# EAGLE board USB_Bit_Whacker-18F2553_Panel_v13a (EAGLE 7.5.0), part 1 of 2
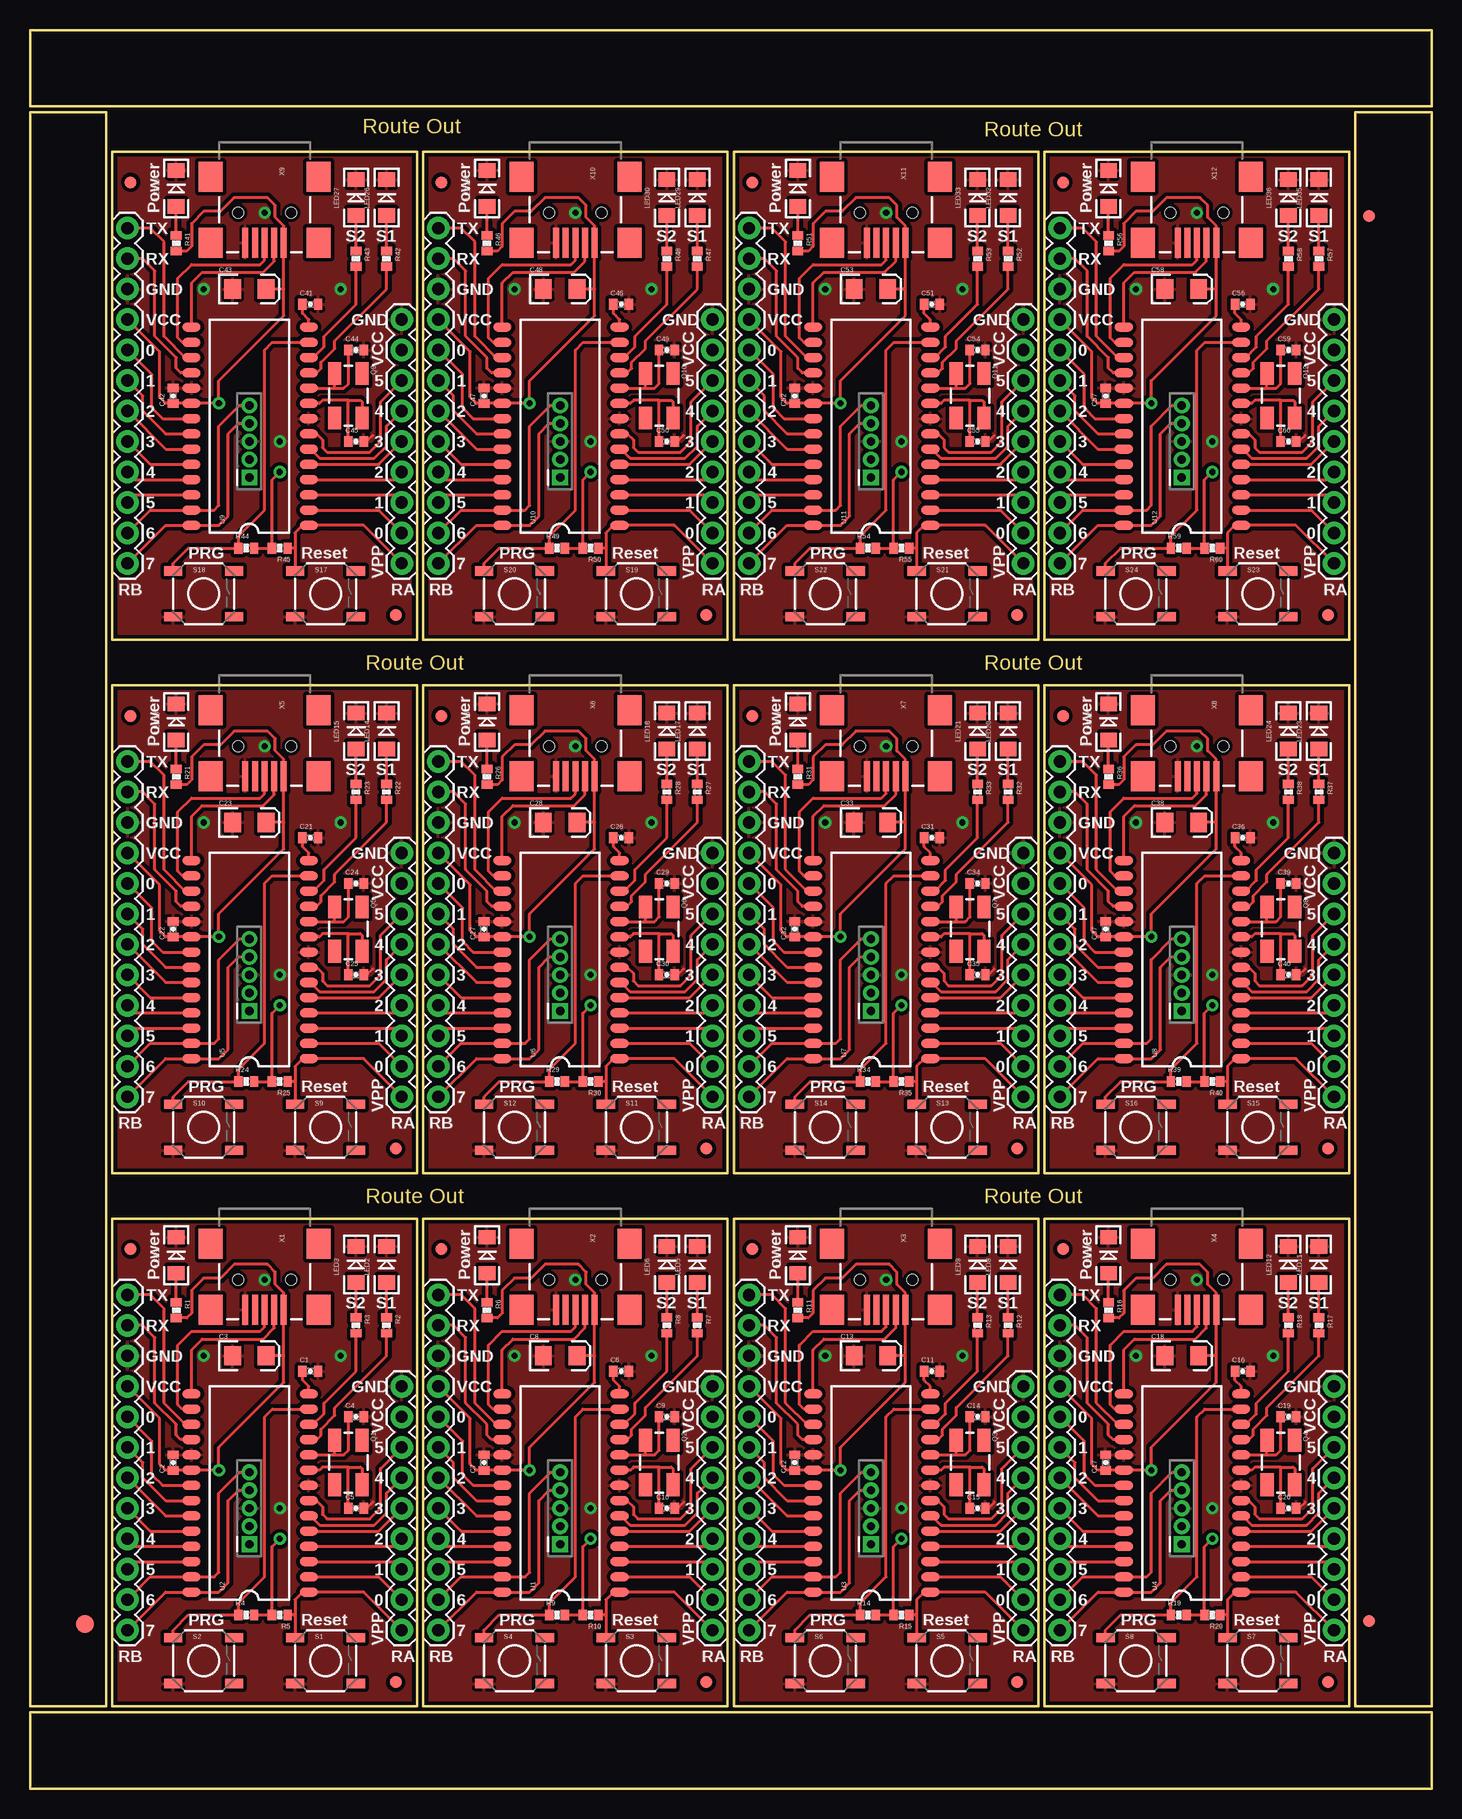
[diagram p0: board, top side]
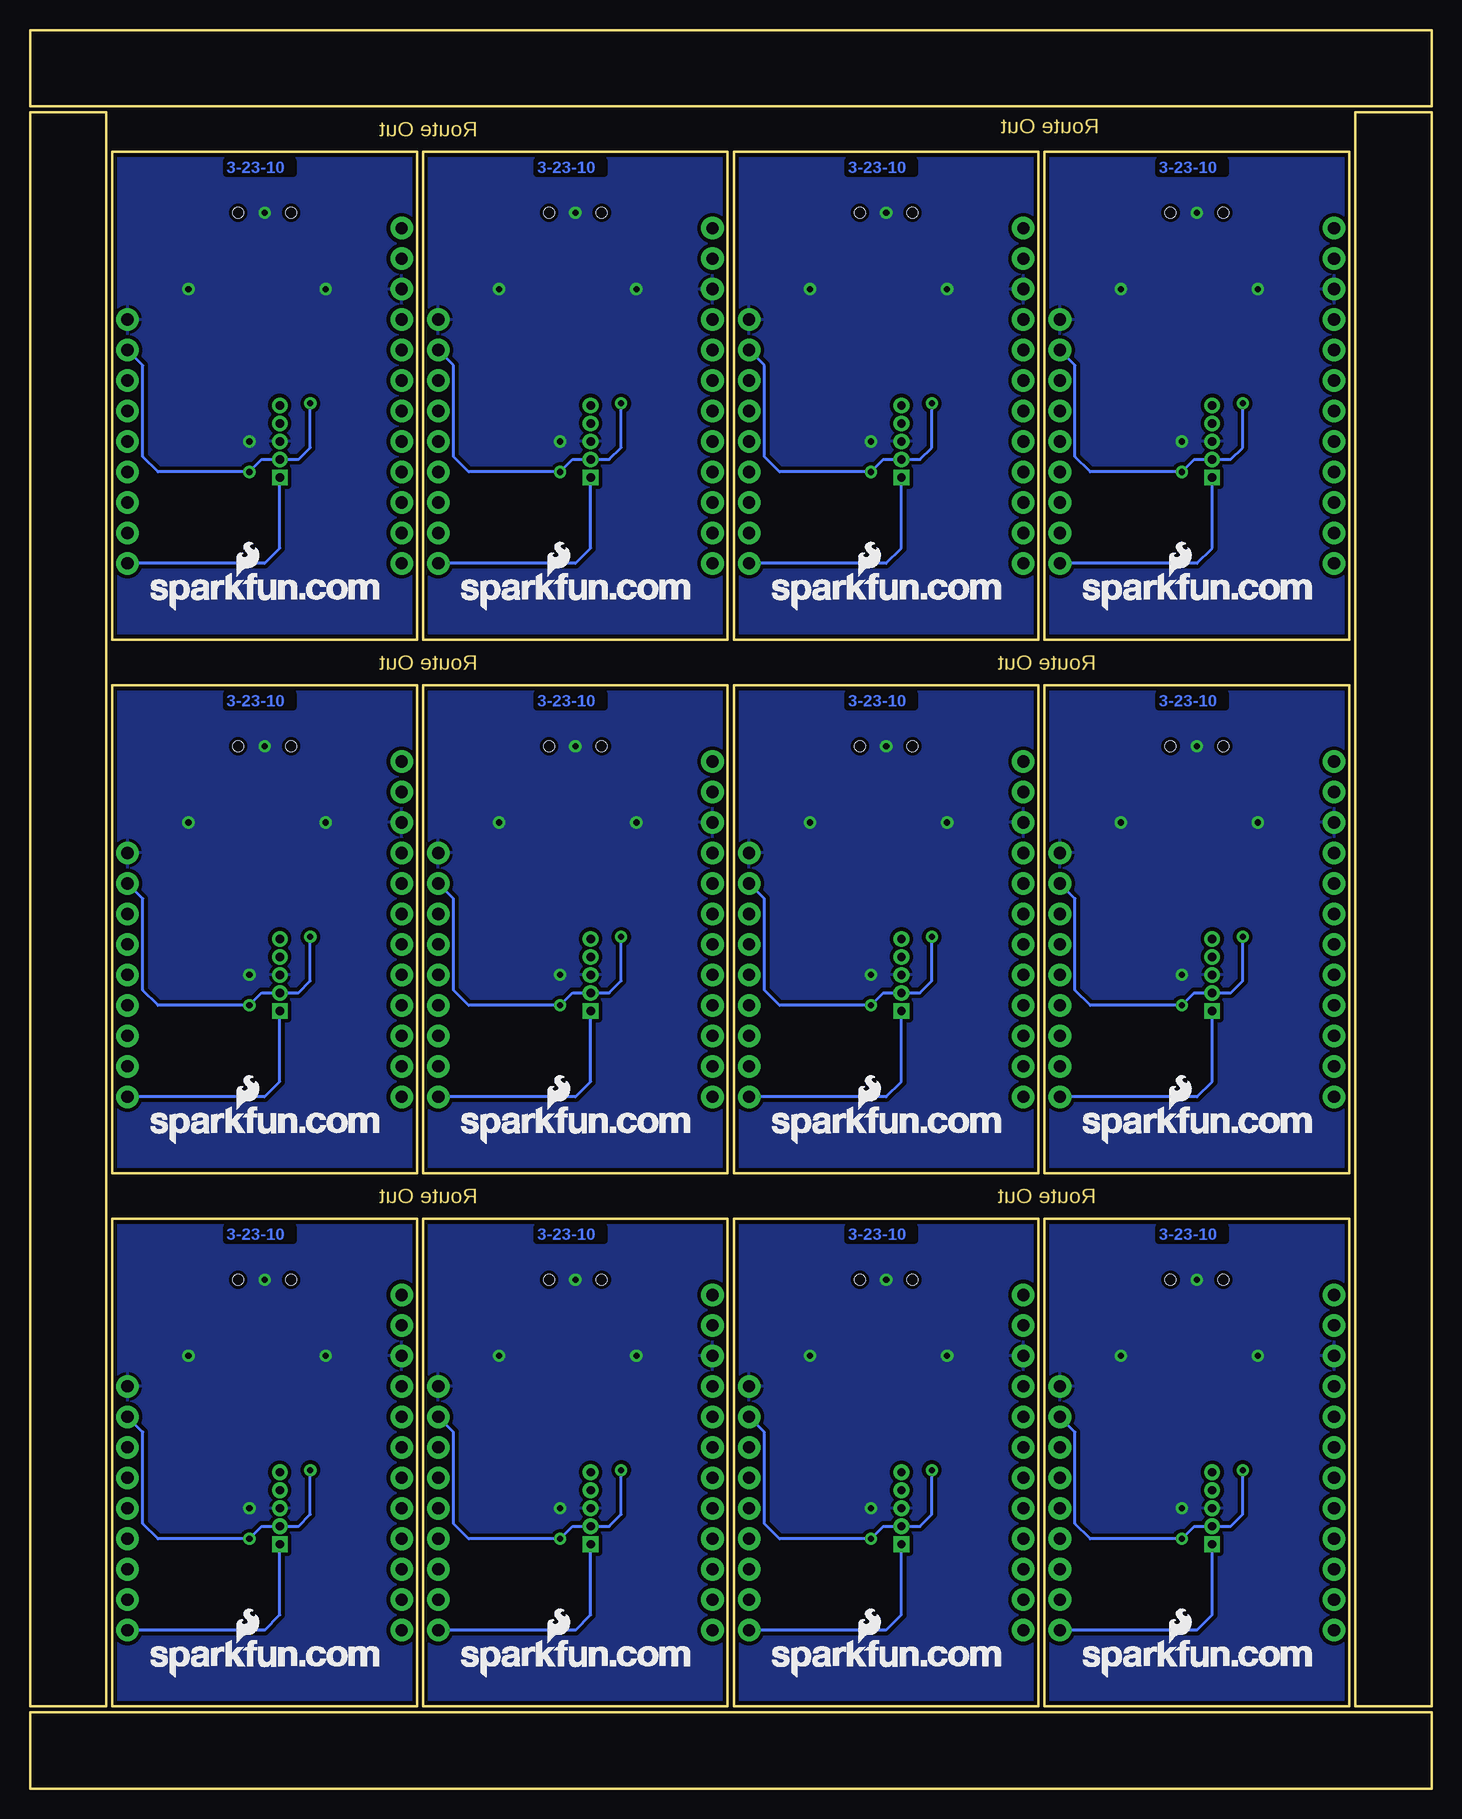
[diagram p1: board, bottom side, seen from below]

Size 116.84 x 146.56 mm. Coordinates in mm from the lower left corner, seen from the top.
Outline: 79.25,140.21 0,140.21 0,146.56 29.72,146.56
Outline: 27.18,146.56 116.84,146.56 116.84,140.21 76.71,140.21
Outline: 6.35,79.25 6.35,6.86 0,6.86 0,29.72
Outline: 0,27.18 0,139.7 6.35,139.7 6.35,76.71
Outline: 79.25,0 0,0 0,6.35 29.72,6.35
Outline: 27.18,6.35 116.84,6.35 116.84,0 76.71,0
Outline: 116.84,79.25 116.84,6.86 110.49,6.86 110.49,29.72
Outline: 110.49,27.18 110.49,139.7 116.84,139.7 116.84,76.71
Outline: 6.86,6.86 32.26,6.86 32.26,47.5 6.86,47.5 6.86,6.86
Outline: 32.77,6.86 58.17,6.86 58.17,47.5 32.77,47.5 32.77,6.86
Outline: 58.67,6.86 84.07,6.86 84.07,47.5 58.67,47.5 58.67,6.86
Outline: 84.58,6.86 109.98,6.86 109.98,47.5 84.58,47.5 84.58,6.86
Outline: 6.86,51.31 32.26,51.31 32.26,91.95 6.86,91.95 6.86,51.31
Outline: 32.77,51.31 58.17,51.31 58.17,91.95 32.77,91.95 32.77,51.31
Outline: 58.67,51.31 84.07,51.31 84.07,91.95 58.67,91.95 58.67,51.31
Outline: 84.58,51.31 109.98,51.31 109.98,91.95 84.58,91.95 84.58,51.31
Outline: 6.86,95.76 32.26,95.76 32.26,136.4 6.86,136.4 6.86,95.76
Outline: 32.77,95.76 58.17,95.76 58.17,136.4 32.77,136.4 32.77,95.76
Outline: 58.67,95.76 84.07,95.76 84.07,136.4 58.67,136.4 58.67,95.76
Outline: 84.58,95.76 109.98,95.76 109.98,136.4 84.58,136.4 84.58,95.76
Copper layers (1*16): Top 0.035mm / dielectric 1.5mm / Bottom 0.035mm
Design rules "SparkFun": minimum track width 8mil, minimum drill 20mil, track to track 8mil, track to pad 8mil, pad to pad 8mil, via to via 8mil, smd to smd 8mil, copper to edge 10mil, drill to drill 8mil, minimum pad ring 12mil, minimum via ring 10mil, stop-mask expansion 4mil, vias tented up to drill 20mil, thermal gap 10mil

## Footprints (pad centres in the part's own frame; a part is rotated, then mirrored left to right if it is on the bottom)
0402-CAP = smd 0.7 x 0.9: 1 -0.65,0; 2 0.65,0
EIA3216 = smd 1.4 x 1.6: A 1.4,0; C -1.4,0
FIDUCIAL-1.5X3 = smd 1.5 x 1.5: 1 0,0
FIDUCIAL-1X2 = smd 1 x 1: 1 0,0
1X12 = drill 1.016 pad 1.88: 1 0,0; 2 2.54,0; 3 5.08,0; 4 7.62,0; 5 10.16,0; 6 12.7,0; 7 15.24,0; 8 17.78,0; 9 20.32,0; 10 22.86,0; 11 25.4,0; 12 27.94,0
PIC-ICSP-MINI = drill 0.7 square: 1 -3,0 | drill 0.7: 2 -1.5,0; 3 0,0; 4 1.5,0; 5 3,0
1X09 = drill 1.016 pad 1.88: 1 0,0; 2 2.54,0; 3 5.08,0; 4 7.62,0; 5 10.16,0; 6 12.7,0; 7 15.24,0; 8 17.78,0; 9 20.32,0
LED-1206 = smd 1.2 x 1.4: A -1.5,0; C 1.5,0
CRYSTAL-SMD-5X3 = smd 1.9 x 1.1: 1 -1.85,-1.15; 2 1.85,-1.15; 3 1.85,1.15; 4 -1.85,1.15
0402-RES = smd 0.7 x 0.9: 1 -0.65,0; 2 0.65,0
TACTILE_SWITCH_SMD = smd 1.524 x 0.762: 1 -2.54,1.905; 2 2.54,1.905; 3 -2.54,-1.905; 4 2.54,-1.905
SO-28W = smd 0.762 x 1.524: 1 -8.255,-4.953; 2 -6.985,-4.953; 3 -5.715,-4.953; 4 -4.445,-4.953; 5 -3.175,-4.953; 6 -1.905,-4.953; 7 -0.635,-4.953; 8 0.635,-4.953; 9 1.905,-4.953; 10 3.175,-4.953; 11 4.445,-4.953; 12 5.715,-4.953; 13 6.985,-4.953; 14 8.255,-4.953; 15 8.255,4.826; 16 6.985,4.826; 17 5.715,4.826; 18 4.445,4.826; 19 3.175,4.826; 20 1.905,4.826; 21 0.635,4.826; 22 -0.635,4.826; 23 -1.905,4.826; 24 -3.175,4.826; 25 -4.445,4.826; 26 -5.715,4.826; 27 -6.985,4.826; 28 -8.255,4.826
USB-MINIB = smd 2.5 x 0.5: D+ 2.5,0; D- 2.5,0.8; GND 2.5,-1.6; ID 2.5,-0.8; VBUS 2.5,1.6 | smd 2.5 x 2: GND@1 -3,-4.5; GND@2 -3,4.5; GND@3 2.5,4.5; GND@4 2.5,-4.5 | hole 0.9: 0,2.2; 0,-2.2

## Placement (x,y rotation side)
C1  0.1uF  [0402-CAP]  23.37,34.8 0 top
C2  0.1uF  [0402-CAP]  11.94,27.18 90 top
C3  10uF  [EIA3216]  18.29,36.07 0 top
C4  22pF  [0402-CAP]  27.18,30.99 0 top
C5  22pF  [0402-CAP]  27.18,23.37 0 top
C6  0.1uF  [0402-CAP]  49.28,34.8 0 top
C7  0.1uF  [0402-CAP]  37.85,27.18 90 top
C8  10uF  [EIA3216]  44.2,36.07 0 top
C9  22pF  [0402-CAP]  53.09,30.99 0 top
C10  22pF  [0402-CAP]  53.09,23.37 0 top
C11  0.1uF  [0402-CAP]  75.18,34.8 0 top
C12  0.1uF  [0402-CAP]  63.75,27.18 90 top
C13  10uF  [EIA3216]  70.1,36.07 0 top
C14  22pF  [0402-CAP]  78.99,30.99 0 top
C15  22pF  [0402-CAP]  78.99,23.37 0 top
C16  0.1uF  [0402-CAP]  101.09,34.8 0 top
C17  0.1uF  [0402-CAP]  89.66,27.18 90 top
C18  10uF  [EIA3216]  96.01,36.07 0 top
C19  22pF  [0402-CAP]  104.9,30.99 0 top
C20  22pF  [0402-CAP]  104.9,23.37 0 top
C21  0.1uF  [0402-CAP]  23.37,79.25 0 top
C22  0.1uF  [0402-CAP]  11.94,71.63 90 top
C23  10uF  [EIA3216]  18.29,80.52 0 top
C24  22pF  [0402-CAP]  27.18,75.44 0 top
C25  22pF  [0402-CAP]  27.18,67.82 0 top
C26  0.1uF  [0402-CAP]  49.28,79.25 0 top
C27  0.1uF  [0402-CAP]  37.85,71.63 90 top
C28  10uF  [EIA3216]  44.2,80.52 0 top
C29  22pF  [0402-CAP]  53.09,75.44 0 top
C30  22pF  [0402-CAP]  53.09,67.82 0 top
C31  0.1uF  [0402-CAP]  75.18,79.25 0 top
C32  0.1uF  [0402-CAP]  63.75,71.63 90 top
C33  10uF  [EIA3216]  70.1,80.52 0 top
C34  22pF  [0402-CAP]  78.99,75.44 0 top
C35  22pF  [0402-CAP]  78.99,67.82 0 top
C36  0.1uF  [0402-CAP]  101.09,79.25 0 top
C37  0.1uF  [0402-CAP]  89.66,71.63 90 top
C38  10uF  [EIA3216]  96.01,80.52 0 top
C39  22pF  [0402-CAP]  104.9,75.44 0 top
C40  22pF  [0402-CAP]  104.9,67.82 0 top
C41  0.1uF  [0402-CAP]  23.37,123.7 0 top
C42  0.1uF  [0402-CAP]  11.94,116.08 90 top
C43  10uF  [EIA3216]  18.29,124.97 0 top
C44  22pF  [0402-CAP]  27.18,119.89 0 top
C45  22pF  [0402-CAP]  27.18,112.27 0 top
C46  0.1uF  [0402-CAP]  49.28,123.7 0 top
C47  0.1uF  [0402-CAP]  37.85,116.08 90 top
C48  10uF  [EIA3216]  44.2,124.97 0 top
C49  22pF  [0402-CAP]  53.09,119.89 0 top
C50  22pF  [0402-CAP]  53.09,112.27 0 top
C51  0.1uF  [0402-CAP]  75.18,123.7 0 top
C52  0.1uF  [0402-CAP]  63.75,116.08 90 top
C53  10uF  [EIA3216]  70.1,124.97 0 top
C54  22pF  [0402-CAP]  78.99,119.89 0 top
C55  22pF  [0402-CAP]  78.99,112.27 0 top
C56  0.1uF  [0402-CAP]  101.09,123.7 0 top
C57  0.1uF  [0402-CAP]  89.66,116.08 90 top
C58  10uF  [EIA3216]  96.01,124.97 0 top
C59  22pF  [0402-CAP]  104.9,119.89 0 top
C60  22pF  [0402-CAP]  104.9,112.27 0 top
E$1  [FIDUCIAL-1.5X3]  4.57,13.72 0 top
E$7  [FIDUCIAL-1X2]  111.63,13.97 0 top
E$8  [FIDUCIAL-1X2]  111.63,131.06 180 top
FID1  FIDUCIAL1X2  [FIDUCIAL-1X2]  8.38,44.96 0 top
FID2  FIDUCIAL1X2  [FIDUCIAL-1X2]  30.48,8.89 0 top
FID3  FIDUCIAL1X2  [FIDUCIAL-1X2]  34.29,44.96 0 top
FID4  FIDUCIAL1X2  [FIDUCIAL-1X2]  56.39,8.89 0 top
FID5  FIDUCIAL1X2  [FIDUCIAL-1X2]  60.2,44.96 0 top
FID6  FIDUCIAL1X2  [FIDUCIAL-1X2]  82.3,8.89 0 top
FID7  FIDUCIAL1X2  [FIDUCIAL-1X2]  86.11,44.96 0 top
FID8  FIDUCIAL1X2  [FIDUCIAL-1X2]  108.2,8.89 0 top
FID9  FIDUCIAL1X2  [FIDUCIAL-1X2]  8.38,89.41 0 top
FID10  FIDUCIAL1X2  [FIDUCIAL-1X2]  30.48,53.34 0 top
FID11  FIDUCIAL1X2  [FIDUCIAL-1X2]  34.29,89.41 0 top
FID12  FIDUCIAL1X2  [FIDUCIAL-1X2]  56.39,53.34 0 top
FID13  FIDUCIAL1X2  [FIDUCIAL-1X2]  60.2,89.41 0 top
FID14  FIDUCIAL1X2  [FIDUCIAL-1X2]  82.3,53.34 0 top
FID15  FIDUCIAL1X2  [FIDUCIAL-1X2]  86.11,89.41 0 top
FID16  FIDUCIAL1X2  [FIDUCIAL-1X2]  108.2,53.34 0 top
FID17  FIDUCIAL1X2  [FIDUCIAL-1X2]  8.38,133.86 0 top
FID18  FIDUCIAL1X2  [FIDUCIAL-1X2]  30.48,97.79 0 top
FID19  FIDUCIAL1X2  [FIDUCIAL-1X2]  34.29,133.86 0 top
FID20  FIDUCIAL1X2  [FIDUCIAL-1X2]  56.39,97.79 0 top
FID21  FIDUCIAL1X2  [FIDUCIAL-1X2]  60.2,133.86 0 top
FID22  FIDUCIAL1X2  [FIDUCIAL-1X2]  82.3,97.79 0 top
FID23  FIDUCIAL1X2  [FIDUCIAL-1X2]  86.11,133.86 0 top
FID24  FIDUCIAL1X2  [FIDUCIAL-1X2]  108.2,97.79 0 top
JP1  [1X12]  34.04,13.21 90 top
JP2  [1X12]  8.13,13.21 90 top
JP3  PIC-ICSP-MINI  [PIC-ICSP-MINI]  18.29,23.37 90 top
JP4  [1X09]  30.99,33.53 270 top
JP5  PIC-ICSP-MINI  [PIC-ICSP-MINI]  44.2,23.37 90 top
JP6  [1X09]  56.9,33.53 270 top
JP7  [1X12]  59.94,13.21 90 top
JP8  PIC-ICSP-MINI  [PIC-ICSP-MINI]  70.1,23.37 90 top
JP9  [1X09]  82.8,33.53 270 top
JP10  [1X12]  85.85,13.21 90 top
JP11  PIC-ICSP-MINI  [PIC-ICSP-MINI]  96.01,23.37 90 top
JP12  [1X09]  108.71,33.53 270 top
JP13  [1X12]  8.13,57.66 90 top
JP14  PIC-ICSP-MINI  [PIC-ICSP-MINI]  18.29,67.82 90 top
JP15  [1X09]  30.99,77.98 270 top
JP16  [1X12]  34.04,57.66 90 top
JP17  PIC-ICSP-MINI  [PIC-ICSP-MINI]  44.2,67.82 90 top
JP18  [1X09]  56.9,77.98 270 top
JP19  [1X12]  59.94,57.66 90 top
JP20  PIC-ICSP-MINI  [PIC-ICSP-MINI]  70.1,67.82 90 top
JP21  [1X09]  82.8,77.98 270 top
JP22  [1X12]  85.85,57.66 90 top
JP23  PIC-ICSP-MINI  [PIC-ICSP-MINI]  96.01,67.82 90 top
JP24  [1X09]  108.71,77.98 270 top
JP25  [1X12]  8.13,102.11 90 top
JP26  PIC-ICSP-MINI  [PIC-ICSP-MINI]  18.29,112.27 90 top
JP27  [1X09]  30.99,122.43 270 top
JP28  [1X12]  34.04,102.11 90 top
JP29  PIC-ICSP-MINI  [PIC-ICSP-MINI]  44.2,112.27 90 top
JP30  [1X09]  56.9,122.43 270 top
JP31  [1X12]  59.94,102.11 90 top
JP32  PIC-ICSP-MINI  [PIC-ICSP-MINI]  70.1,112.27 90 top
JP33  [1X09]  82.8,122.43 270 top
JP34  [1X12]  85.85,102.11 90 top
JP35  PIC-ICSP-MINI  [PIC-ICSP-MINI]  96.01,112.27 90 top
JP36  [1X09]  108.71,122.43 270 top
LED1  Green  [LED-1206]  12.19,44.45 90 top
LED2  Yellow  [LED-1206]  29.72,43.69 90 top
LED3  Red  [LED-1206]  27.18,43.69 90 top
LED4  Green  [LED-1206]  38.1,44.45 90 top
LED5  Yellow  [LED-1206]  55.63,43.69 90 top
LED6  Red  [LED-1206]  53.09,43.69 90 top
LED7  Green  [LED-1206]  64.01,44.45 90 top
LED8  Yellow  [LED-1206]  81.53,43.69 90 top
LED9  Red  [LED-1206]  78.99,43.69 90 top
LED10  Green  [LED-1206]  89.92,44.45 90 top
LED11  Yellow  [LED-1206]  107.44,43.69 90 top
LED12  Red  [LED-1206]  104.9,43.69 90 top
LED13  Green  [LED-1206]  12.19,88.9 90 top
LED14  Yellow  [LED-1206]  29.72,88.14 90 top
LED15  Red  [LED-1206]  27.18,88.14 90 top
LED16  Green  [LED-1206]  38.1,88.9 90 top
LED17  Yellow  [LED-1206]  55.63,88.14 90 top
LED18  Red  [LED-1206]  53.09,88.14 90 top
LED19  Green  [LED-1206]  64.01,88.9 90 top
LED20  Yellow  [LED-1206]  81.53,88.14 90 top
LED21  Red  [LED-1206]  78.99,88.14 90 top
LED22  Green  [LED-1206]  89.92,88.9 90 top
LED23  Yellow  [LED-1206]  107.44,88.14 90 top
LED24  Red  [LED-1206]  104.9,88.14 90 top
LED25  Green  [LED-1206]  12.19,133.35 90 top
LED26  Yellow  [LED-1206]  29.72,132.59 90 top
LED27  Red  [LED-1206]  27.18,132.59 90 top
LED28  Green  [LED-1206]  38.1,133.35 90 top
LED29  Yellow  [LED-1206]  55.63,132.59 90 top
LED30  Red  [LED-1206]  53.09,132.59 90 top
LED31  Green  [LED-1206]  64.01,133.35 90 top
LED32  Yellow  [LED-1206]  81.53,132.59 90 top
LED33  Red  [LED-1206]  78.99,132.59 90 top
LED34  Green  [LED-1206]  89.92,133.35 90 top
LED35  Yellow  [LED-1206]  107.44,132.59 90 top
LED36  Red  [LED-1206]  104.9,132.59 90 top
Q1  24MHz  [CRYSTAL-SMD-5X3]  26.54,27.18 270 top
Q2  24MHz  [CRYSTAL-SMD-5X3]  52.45,27.18 270 top
Q3  24MHz  [CRYSTAL-SMD-5X3]  78.36,27.18 270 top
Q4  24MHz  [CRYSTAL-SMD-5X3]  104.27,27.18 270 top
Q5  24MHz  [CRYSTAL-SMD-5X3]  26.54,71.63 270 top
Q6  24MHz  [CRYSTAL-SMD-5X3]  52.45,71.63 270 top
Q7  24MHz  [CRYSTAL-SMD-5X3]  78.36,71.63 270 top
Q8  24MHz  [CRYSTAL-SMD-5X3]  104.27,71.63 270 top
Q9  24MHz  [CRYSTAL-SMD-5X3]  26.54,116.08 270 top
Q10  24MHz  [CRYSTAL-SMD-5X3]  52.45,116.08 270 top
Q11  24MHz  [CRYSTAL-SMD-5X3]  78.36,116.08 270 top
Q12  24MHz  [CRYSTAL-SMD-5X3]  104.27,116.08 270 top
R1  330  [0402-RES]  12.19,39.88 270 top
R2  330  [0402-RES]  29.72,38.61 270 top
R3  330  [0402-RES]  27.18,38.61 270 top
R4  10K  [0402-RES]  18.03,14.48 0 top
R5  10K  [0402-RES]  20.83,14.48 180 top
R6  330  [0402-RES]  38.1,39.88 270 top
R7  330  [0402-RES]  55.63,38.61 270 top
R8  330  [0402-RES]  53.09,38.61 270 top
R9  10K  [0402-RES]  43.94,14.48 0 top
R10  10K  [0402-RES]  46.74,14.48 180 top
R11  330  [0402-RES]  64.01,39.88 270 top
R12  330  [0402-RES]  81.53,38.61 270 top
R13  330  [0402-RES]  78.99,38.61 270 top
R14  10K  [0402-RES]  69.85,14.48 0 top
R15  10K  [0402-RES]  72.64,14.48 180 top
R16  330  [0402-RES]  89.92,39.88 270 top
R17  330  [0402-RES]  107.44,38.61 270 top
R18  330  [0402-RES]  104.9,38.61 270 top
R19  10K  [0402-RES]  95.76,14.48 0 top
R20  10K  [0402-RES]  98.55,14.48 180 top
R21  330  [0402-RES]  12.19,84.33 270 top
R22  330  [0402-RES]  29.72,83.06 270 top
R23  330  [0402-RES]  27.18,83.06 270 top
R24  10K  [0402-RES]  18.03,58.93 0 top
R25  10K  [0402-RES]  20.83,58.93 180 top
R26  330  [0402-RES]  38.1,84.33 270 top
R27  330  [0402-RES]  55.63,83.06 270 top
R28  330  [0402-RES]  53.09,83.06 270 top
R29  10K  [0402-RES]  43.94,58.93 0 top
R30  10K  [0402-RES]  46.74,58.93 180 top
R31  330  [0402-RES]  64.01,84.33 270 top
R32  330  [0402-RES]  81.53,83.06 270 top
R33  330  [0402-RES]  78.99,83.06 270 top
R34  10K  [0402-RES]  69.85,58.93 0 top
R35  10K  [0402-RES]  72.64,58.93 180 top
R36  330  [0402-RES]  89.92,84.33 270 top
R37  330  [0402-RES]  107.44,83.06 270 top
R38  330  [0402-RES]  104.9,83.06 270 top
R39  10K  [0402-RES]  95.76,58.93 0 top
R40  10K  [0402-RES]  98.55,58.93 180 top
R41  330  [0402-RES]  12.19,128.78 270 top
R42  330  [0402-RES]  29.72,127.51 270 top
R43  330  [0402-RES]  27.18,127.51 270 top
R44  10K  [0402-RES]  18.03,103.38 0 top
R45  10K  [0402-RES]  20.83,103.38 180 top
R46  330  [0402-RES]  38.1,128.78 270 top
R47  330  [0402-RES]  55.63,127.51 270 top
R48  330  [0402-RES]  53.09,127.51 270 top
R49  10K  [0402-RES]  43.94,103.38 0 top
R50  10K  [0402-RES]  46.74,103.38 180 top
R51  330  [0402-RES]  64.01,128.78 270 top
R52  330  [0402-RES]  81.53,127.51 270 top
R53  330  [0402-RES]  78.99,127.51 270 top
R54  10K  [0402-RES]  69.85,103.38 0 top
R55  10K  [0402-RES]  72.64,103.38 180 top
R56  330  [0402-RES]  89.92,128.78 270 top
R57  330  [0402-RES]  107.44,127.51 270 top
R58  330  [0402-RES]  104.9,127.51 270 top
R59  10K  [0402-RES]  95.76,103.38 0 top
R60  10K  [0402-RES]  98.55,103.38 180 top
S1  Reset  [TACTILE_SWITCH_SMD]  24.64,10.67 0 top
S2  PRG  [TACTILE_SWITCH_SMD]  14.48,10.67 0 top
S3  Reset  [TACTILE_SWITCH_SMD]  50.55,10.67 0 top
S4  PRG  [TACTILE_SWITCH_SMD]  40.39,10.67 0 top
S5  Reset  [TACTILE_SWITCH_SMD]  76.45,10.67 0 top
S6  PRG  [TACTILE_SWITCH_SMD]  66.29,10.67 0 top
S7  Reset  [TACTILE_SWITCH_SMD]  102.36,10.67 0 top
S8  PRG  [TACTILE_SWITCH_SMD]  92.2,10.67 0 top
S9  Reset  [TACTILE_SWITCH_SMD]  24.64,55.12 0 top
S10  PRG  [TACTILE_SWITCH_SMD]  14.48,55.12 0 top
S11  Reset  [TACTILE_SWITCH_SMD]  50.55,55.12 0 top
S12  PRG  [TACTILE_SWITCH_SMD]  40.39,55.12 0 top
S13  Reset  [TACTILE_SWITCH_SMD]  76.45,55.12 0 top
S14  PRG  [TACTILE_SWITCH_SMD]  66.29,55.12 0 top
S15  Reset  [TACTILE_SWITCH_SMD]  102.36,55.12 0 top
S16  PRG  [TACTILE_SWITCH_SMD]  92.2,55.12 0 top
S17  Reset  [TACTILE_SWITCH_SMD]  24.64,99.57 0 top
S18  PRG  [TACTILE_SWITCH_SMD]  14.48,99.57 0 top
S19  Reset  [TACTILE_SWITCH_SMD]  50.55,99.57 0 top
S20  PRG  [TACTILE_SWITCH_SMD]  40.39,99.57 0 top
S21  Reset  [TACTILE_SWITCH_SMD]  76.45,99.57 0 top
S22  PRG  [TACTILE_SWITCH_SMD]  66.29,99.57 0 top
S23  Reset  [TACTILE_SWITCH_SMD]  102.36,99.57 0 top
S24  PRG  [TACTILE_SWITCH_SMD]  92.2,99.57 0 top
U1  PIC18F2455  [SO-28W]  44.2,24.64 90 top
U2  PIC18F2455  [SO-28W]  18.29,24.64 90 top
U3  PIC18F2455  [SO-28W]  70.1,24.64 90 top
U4  PIC18F2455  [SO-28W]  96.01,24.64 90 top
U5  PIC18F2455  [SO-28W]  18.29,69.09 90 top
U6  PIC18F2455  [SO-28W]  44.2,69.09 90 top
U7  PIC18F2455  [SO-28W]  70.1,69.09 90 top
U8  PIC18F2455  [SO-28W]  96.01,69.09 90 top
U9  PIC18F2455  [SO-28W]  18.29,113.54 90 top
U10  PIC18F2455  [SO-28W]  44.2,113.54 90 top
U11  PIC18F2455  [SO-28W]  70.1,113.54 90 top
U12  PIC18F2455  [SO-28W]  96.01,113.54 90 top
U$1  LOGO-SFENEW  [SFE-NEW-WEBLOGO]  29.08,9.27 0 bottom
U$2  LOGO-SFENEW  [SFE-NEW-WEBLOGO]  54.99,9.27 0 bottom
U$3  LOGO-SFENEW  [SFE-NEW-WEBLOGO]  80.9,9.27 0 bottom
U$4  LOGO-SFENEW  [SFE-NEW-WEBLOGO]  106.81,9.27 0 bottom
U$5  LOGO-SFENEW  [SFE-NEW-WEBLOGO]  29.08,53.72 0 bottom
U$6  LOGO-SFENEW  [SFE-NEW-WEBLOGO]  54.99,53.72 0 bottom
U$7  LOGO-SFENEW  [SFE-NEW-WEBLOGO]  80.9,53.72 0 bottom
U$8  LOGO-SFENEW  [SFE-NEW-WEBLOGO]  106.81,53.72 0 bottom
U$9  LOGO-SFENEW  [SFE-NEW-WEBLOGO]  29.08,98.17 0 bottom
U$10  LOGO-SFENEW  [SFE-NEW-WEBLOGO]  54.99,98.17 0 bottom
U$11  LOGO-SFENEW  [SFE-NEW-WEBLOGO]  80.9,98.17 0 bottom
U$12  LOGO-SFENEW  [SFE-NEW-WEBLOGO]  106.81,98.17 0 bottom
X1  USBSMD  [USB-MINIB]  19.56,42.42 270 top
X2  USBSMD  [USB-MINIB]  45.47,42.42 270 top
X3  USBSMD  [USB-MINIB]  71.37,42.42 270 top
X4  USBSMD  [USB-MINIB]  97.28,42.42 270 top
X5  USBSMD  [USB-MINIB]  19.56,86.87 270 top
X6  USBSMD  [USB-MINIB]  45.47,86.87 270 top
X7  USBSMD  [USB-MINIB]  71.37,86.87 270 top
X8  USBSMD  [USB-MINIB]  97.28,86.87 270 top
X9  USBSMD  [USB-MINIB]  19.56,131.32 270 top
X10  USBSMD  [USB-MINIB]  45.47,131.32 270 top
X11  USBSMD  [USB-MINIB]  71.37,131.32 270 top
X12  USBSMD  [USB-MINIB]  97.28,131.32 270 top

## Library data of the parts
C1-C60 JP1-JP36 LED1-LED36 Q1-Q12 R1-R60 S1-S24 U1-U12 U$1-U$12 X1-X12 = SparkFun
E$1 = SparkFun-Retired
E$7 E$8 FID1-FID24 = SparkFun-Aesthetics

## Nets
CS1: R4.1 S2.1 U2.13
CS2: R9.1 S4.1 U1.13
CS3: R14.1 S6.1 U3.13
CS4: R19.1 S8.1 U4.13
CS5: R24.1 S10.1 U5.13
CS6: R29.1 S12.1 U6.13
CS7: R34.1 S14.1 U7.13
CS8: R39.1 S16.1 U8.13
CS9: R44.1 S18.1 U9.13
CS10: R49.1 S20.1 U10.13
CS11: R54.1 S22.1 U11.13
CS12: R59.1 S24.1 U12.13
D+: U2.16 X1.D+
D+1: U1.16 X2.D+
D+2: U3.16 X3.D+
D+3: U4.16 X4.D+
D+4: U5.16 X5.D+
D+5: U6.16 X6.D+
D+6: U7.16 X7.D+
D+7: U8.16 X8.D+
D+8: U9.16 X9.D+
D+9: U10.16 X10.D+
D+10: U11.16 X11.D+
D+11: U12.16 X12.D+
D-: U2.15 X1.D-
D-1: U1.15 X2.D-
D-2: U3.15 X3.D-
D-3: U4.15 X4.D-
D-4: U5.15 X5.D-
D-5: U6.15 X6.D-
D-6: U7.15 X7.D-
D-7: U8.15 X8.D-
D-8: U9.15 X9.D-
D-9: U10.15 X10.D-
D-10: U11.15 X11.D-
D-11: U12.15 X12.D-
GND: C1.2 C2.2 C3.C C4.2 C5.2 JP2.10 JP3.3 JP4.1 LED1.C LED2.C LED3.C S1.3 S2.3 U2.8 U2.19 X1.GND
GND1: C6.2 C7.2 C8.C C9.2 C10.2 JP1.10 JP5.3 JP6.1 LED4.C LED5.C LED6.C S3.3 S4.3 U1.8 U1.19 X2.GND
GND2: C11.2 C12.2 C13.C C14.2 C15.2 JP7.10 JP8.3 JP9.1 LED7.C LED8.C LED9.C S5.3 S6.3 U3.8 U3.19 X3.GND
GND3: C16.2 C17.2 C18.C C19.2 C20.2 JP10.10 JP11.3 JP12.1 LED10.C LED11.C LED12.C S7.3 S8.3 U4.8 U4.19 X4.GND
GND4: C21.2 C22.2 C23.C C24.2 C25.2 JP13.10 JP14.3 JP15.1 LED13.C LED14.C LED15.C S9.3 S10.3 U5.8 U5.19 X5.GND
GND5: C26.2 C27.2 C28.C C29.2 C30.2 JP16.10 JP17.3 JP18.1 LED16.C LED17.C LED18.C S11.3 S12.3 U6.8 U6.19 X6.GND
GND6: C31.2 C32.2 C33.C C34.2 C35.2 JP19.10 JP20.3 JP21.1 LED19.C LED20.C LED21.C S13.3 S14.3 U7.8 U7.19 X7.GND
GND7: C36.2 C37.2 C38.C C39.2 C40.2 JP22.10 JP23.3 JP24.1 LED22.C LED23.C LED24.C S15.3 S16.3 U8.8 U8.19 X8.GND
GND8: C41.2 C42.2 C43.C C44.2 C45.2 JP25.10 JP26.3 JP27.1 LED25.C LED26.C LED27.C S17.3 S18.3 U9.8 U9.19 X9.GND
GND9: C46.2 C47.2 C48.C C49.2 C50.2 JP28.10 JP29.3 JP30.1 LED28.C LED29.C LED30.C S19.3 S20.3 U10.8 U10.19 X10.GND
GND10: C51.2 C52.2 C53.C C54.2 C55.2 JP31.10 JP32.3 JP33.1 LED31.C LED32.C LED33.C S21.3 S22.3 U11.8 U11.19 X11.GND
GND11: C56.2 C57.2 C58.C C59.2 C60.2 JP34.10 JP35.3 JP36.1 LED34.C LED35.C LED36.C S23.3 S24.3 U12.8 U12.19 X12.GND
N$1: C1.1 U2.14
N$2: C6.1 U1.14
N$3: LED4.A R6.1
N$4: LED1.A R1.1
N$5: LED2.A R2.1
N$6: LED3.A R3.1
N$7: LED5.A R7.1
N$8: LED6.A R8.1
N$9: C11.1 U3.14
N$10: LED7.A R11.1
N$11: LED8.A R12.1
N$12: LED9.A R13.1
N$13: C16.1 U4.14
N$14: LED10.A R16.1
N$15: LED11.A R17.1
N$16: LED12.A R18.1
N$17: C21.1 U5.14
N$18: LED13.A R21.1
N$19: LED14.A R22.1
N$20: LED15.A R23.1
N$21: C26.1 U6.14
N$22: LED16.A R26.1
N$23: LED17.A R27.1
N$24: LED18.A R28.1
N$25: C31.1 U7.14
N$26: LED19.A R31.1
N$27: LED20.A R32.1
N$28: LED21.A R33.1
N$29: C36.1 U8.14
N$30: LED22.A R36.1
N$31: LED23.A R37.1
N$32: LED24.A R38.1
N$33: C41.1 U9.14
N$34: LED25.A R41.1
N$35: LED26.A R42.1
N$36: LED27.A R43.1
N$37: C46.1 U10.14
N$38: LED28.A R46.1
N$39: LED29.A R47.1
N$40: LED30.A R48.1
N$41: C51.1 U11.14
N$42: LED31.A R51.1
N$43: LED32.A R52.1
N$44: LED33.A R53.1
N$45: C56.1 U12.14
N$46: LED34.A R56.1
N$47: LED35.A R57.1
N$48: LED36.A R58.1
OSC1: C5.1 Q1.3 U2.9
OSC2: C4.1 Q1.1 U2.10
OSC3: C9.1 Q2.1 U1.10
OSC4: C10.1 Q2.3 U1.9
OSC5: C14.1 Q3.1 U3.10
OSC6: C15.1 Q3.3 U3.9
OSC7: C19.1 Q4.1 U4.10
OSC8: C20.1 Q4.3 U4.9
OSC9: C24.1 Q5.1 U5.10
OSC10: C25.1 Q5.3 U5.9
OSC11: C29.1 Q6.1 U6.10
OSC12: C30.1 Q6.3 U6.9
OSC13: C34.1 Q7.1 U7.10
OSC14: C35.1 Q7.3 U7.9
OSC15: C39.1 Q8.1 U8.10
OSC16: C40.1 Q8.3 U8.9
OSC17: C44.1 Q9.1 U9.10
OSC18: C45.1 Q9.3 U9.9
OSC19: C49.1 Q10.1 U10.10
OSC20: C50.1 Q10.3 U10.9
OSC21: C54.1 Q11.1 U11.10
OSC22: C55.1 Q11.3 U11.9
OSC23: C59.1 Q12.1 U12.10
OSC24: C60.1 Q12.3 U12.9
PGC: JP2.2 JP3.5 U2.27
PGC1: JP1.2 JP5.5 U1.27
PGC2: JP7.2 JP8.5 U3.27
PGC3: JP10.2 JP11.5 U4.27
PGC4: JP13.2 JP14.5 U5.27
PGC5: JP16.2 JP17.5 U6.27
PGC6: JP19.2 JP20.5 U7.27
PGC7: JP22.2 JP23.5 U8.27
PGC8: JP25.2 JP26.5 U9.27
PGC9: JP28.2 JP29.5 U10.27
PGC10: JP31.2 JP32.5 U11.27
PGC11: JP34.2 JP35.5 U12.27
PGD: JP2.1 JP3.4 U2.28
PGD1: JP1.1 JP5.4 U1.28
PGD2: JP7.1 JP8.4 U3.28
PGD3: JP10.1 JP11.4 U4.28
PGD4: JP13.1 JP14.4 U5.28
PGD5: JP16.1 JP17.4 U6.28
PGD6: JP19.1 JP20.4 U7.28
PGD7: JP22.1 JP23.4 U8.28
PGD8: JP25.1 JP26.4 U9.28
PGD9: JP28.1 JP29.4 U10.28
PGD10: JP31.1 JP32.4 U11.28
PGD11: JP34.1 JP35.4 U12.28
RA0: JP4.8 U2.2
RA1: JP4.7 U2.3
RA2: JP4.6 U2.4
RA3: JP4.5 U2.5
RA4: JP4.4 U2.6
RA5: JP4.3 U2.7
RA6: JP6.8 U1.2
RA7: JP6.7 U1.3
RA8: JP6.6 U1.4
RA9: JP6.5 U1.5
RA10: JP6.4 U1.6
RA11: JP6.3 U1.7
RA12: JP9.8 U3.2
RA13: JP9.7 U3.3
RA14: JP9.6 U3.4
RA15: JP9.5 U3.5
RA16: JP9.4 U3.6
RA17: JP9.3 U3.7
RA18: JP12.8 U4.2
RA19: JP12.7 U4.3
RA20: JP12.6 U4.4
RA21: JP12.5 U4.5
RA22: JP12.4 U4.6
RA23: JP12.3 U4.7
RA24: JP15.8 U5.2
RA25: JP15.7 U5.3
RA26: JP15.6 U5.4
RA27: JP15.5 U5.5
RA28: JP15.4 U5.6
RA29: JP15.3 U5.7
RA30: JP18.8 U6.2
RA31: JP18.7 U6.3
RA32: JP18.6 U6.4
RA33: JP18.5 U6.5
RA34: JP18.4 U6.6
RA35: JP18.3 U6.7
RA36: JP21.8 U7.2
RA37: JP21.7 U7.3
RA38: JP21.6 U7.4
RA39: JP21.5 U7.5
RA40: JP21.4 U7.6
RA41: JP21.3 U7.7
RA42: JP24.8 U8.2
RA43: JP24.7 U8.3
RA44: JP24.6 U8.4
RA45: JP24.5 U8.5
RA46: JP24.4 U8.6
RA47: JP24.3 U8.7
RA48: JP27.8 U9.2
RA49: JP27.7 U9.3
RA50: JP27.6 U9.4
RA51: JP27.5 U9.5
RA52: JP27.4 U9.6
RA53: JP27.3 U9.7
RA54: JP30.8 U10.2
RA55: JP30.7 U10.3
RA56: JP30.6 U10.4
RA57: JP30.5 U10.5
RA58: JP30.4 U10.6
RA59: JP30.3 U10.7
RA60: JP33.8 U11.2
RA61: JP33.7 U11.3
RA62: JP33.6 U11.4
RA63: JP33.5 U11.5
RA64: JP33.4 U11.6
RA65: JP33.3 U11.7
RA66: JP36.8 U12.2
RA67: JP36.7 U12.3
RA68: JP36.6 U12.4
RA69: JP36.5 U12.5
RA70: JP36.4 U12.6
RA71: JP36.3 U12.7
RB0: JP2.8 U2.21
RB1: JP2.7 U2.22
RB2: JP2.6 U2.23
RB3: JP2.5 U2.24
RB4: JP2.4 U2.25
RB5: JP2.3 U2.26
RB6: JP1.3 U1.26
RB7: JP1.4 U1.25
RB8: JP1.5 U1.24
RB9: JP1.6 U1.23
RB10: JP1.7 U1.22
RB11: JP1.8 U1.21
RB12: JP7.3 U3.26
RB13: JP7.4 U3.25
RB14: JP7.5 U3.24
RB15: JP7.6 U3.23
RB16: JP7.7 U3.22
RB17: JP7.8 U3.21
RB18: JP10.3 U4.26
RB19: JP10.4 U4.25
RB20: JP10.5 U4.24
RB21: JP10.6 U4.23
RB22: JP10.7 U4.22
RB23: JP10.8 U4.21
RB24: JP13.3 U5.26
RB25: JP13.4 U5.25
RB26: JP13.5 U5.24
RB27: JP13.6 U5.23
RB28: JP13.7 U5.22
RB29: JP13.8 U5.21
RB30: JP16.3 U6.26
RB31: JP16.4 U6.25
RB32: JP16.5 U6.24
RB33: JP16.6 U6.23
RB34: JP16.7 U6.22
RB35: JP16.8 U6.21
RB36: JP19.3 U7.26
RB37: JP19.4 U7.25
RB38: JP19.5 U7.24
RB39: JP19.6 U7.23
RB40: JP19.7 U7.22
RB41: JP19.8 U7.21
RB42: JP22.3 U8.26
RB43: JP22.4 U8.25
RB44: JP22.5 U8.24
RB45: JP22.6 U8.23
RB46: JP22.7 U8.22
RB47: JP22.8 U8.21
RB48: JP25.3 U9.26
RB49: JP25.4 U9.25
RB50: JP25.5 U9.24
RB51: JP25.6 U9.23
RB52: JP25.7 U9.22
RB53: JP25.8 U9.21
RB54: JP28.3 U10.26
RB55: JP28.4 U10.25
RB56: JP28.5 U10.24
RB57: JP28.6 U10.23
RB58: JP28.7 U10.22
RB59: JP28.8 U10.21
RB60: JP31.3 U11.26
RB61: JP31.4 U11.25
RB62: JP31.5 U11.24
RB63: JP31.6 U11.23
RB64: JP31.7 U11.22
RB65: JP31.8 U11.21
RB66: JP34.3 U12.26
RB67: JP34.4 U12.25
RB68: JP34.5 U12.24
RB69: JP34.6 U12.23
RB70: JP34.7 U12.22
RB71: JP34.8 U12.21
RX: JP2.11 U2.18
RX1: JP1.11 U1.18
RX2: JP7.11 U3.18
RX3: JP10.11 U4.18
RX4: JP13.11 U5.18
RX5: JP16.11 U6.18
RX6: JP19.11 U7.18
RX7: JP22.11 U8.18
RX8: JP25.11 U9.18
RX9: JP28.11 U10.18
RX10: JP31.11 U11.18
RX11: JP34.11 U12.18
SL1: R2.2 U2.11
SL2: R3.2 U2.12
SL3: R7.2 U1.11
SL4: R8.2 U1.12
SL5: R12.2 U3.11
SL6: R13.2 U3.12
SL7: R17.2 U4.11
SL8: R18.2 U4.12
SL9: R22.2 U5.11
SL10: R23.2 U5.12
SL11: R27.2 U6.11
SL12: R28.2 U6.12
SL13: R32.2 U7.11
SL14: R33.2 U7.12
SL15: R37.2 U8.11
SL16: R38.2 U8.12
SL17: R42.2 U9.11
SL18: R43.2 U9.12
SL19: R47.2 U10.11
SL20: R48.2 U10.12
SL21: R52.2 U11.11
SL22: R53.2 U11.12
SL23: R57.2 U12.11
SL24: R58.2 U12.12
TX: JP2.12 U2.17
TX1: JP1.12 U1.17
TX2: JP7.12 U3.17
TX3: JP10.12 U4.17
TX4: JP13.12 U5.17
TX5: JP16.12 U6.17
TX6: JP19.12 U7.17
TX7: JP22.12 U8.17
TX8: JP25.12 U9.17
TX9: JP28.12 U10.17
TX10: JP31.12 U11.17
TX11: JP34.12 U12.17
VCC: C2.1 C3.A JP2.9 JP3.2 JP4.2 R1.2 R4.2 R5.2 U2.20 X1.VBUS
VCC1: C7.1 C8.A JP1.9 JP5.2 JP6.2 R6.2 R9.2 R10.2 U1.20 X2.VBUS
VCC2: C12.1 C13.A JP7.9 JP8.2 JP9.2 R11.2 R14.2 R15.2 U3.20 X3.VBUS
VCC3: C17.1 C18.A JP10.9 JP11.2 JP12.2 R16.2 R19.2 R20.2 U4.20 X4.VBUS
VCC4: C22.1 C23.A JP13.9 JP14.2 JP15.2 R21.2 R24.2 R25.2 U5.20 X5.VBUS
VCC5: C27.1 C28.A JP16.9 JP17.2 JP18.2 R26.2 R29.2 R30.2 U6.20 X6.VBUS
VCC6: C32.1 C33.A JP19.9 JP20.2 JP21.2 R31.2 R34.2 R35.2 U7.20 X7.VBUS
VCC7: C37.1 C38.A JP22.9 JP23.2 JP24.2 R36.2 R39.2 R40.2 U8.20 X8.VBUS
VCC8: C42.1 C43.A JP25.9 JP26.2 JP27.2 R41.2 R44.2 R45.2 U9.20 X9.VBUS
VCC9: C47.1 C48.A JP28.9 JP29.2 JP30.2 R46.2 R49.2 R50.2 U10.20 X10.VBUS
VCC10: C52.1 C53.A JP31.9 JP32.2 JP33.2 R51.2 R54.2 R55.2 U11.20 X11.VBUS
VCC11: C57.1 C58.A JP34.9 JP35.2 JP36.2 R56.2 R59.2 R60.2 U12.20 X12.VBUS
VPP: JP3.1 JP4.9 R5.1 S1.1 U2.1
VPP1: JP5.1 JP6.9 R10.1 S3.1 U1.1
VPP2: JP8.1 JP9.9 R15.1 S5.1 U3.1
VPP3: JP11.1 JP12.9 R20.1 S7.1 U4.1
VPP4: JP14.1 JP15.9 R25.1 S9.1 U5.1
VPP5: JP17.1 JP18.9 R30.1 S11.1 U6.1
VPP6: JP20.1 JP21.9 R35.1 S13.1 U7.1
VPP7: JP23.1 JP24.9 R40.1 S15.1 U8.1
VPP8: JP26.1 JP27.9 R45.1 S17.1 U9.1
VPP9: JP29.1 JP30.9 R50.1 S19.1 U10.1
VPP10: JP32.1 JP33.9 R55.1 S21.1 U11.1
VPP11: JP35.1 JP36.9 R60.1 S23.1 U12.1